# Altium PCB WiFi小车.PcbDoc
Units mil, origin at the board's own origin, x right, y up, seen from the top; angles counter-clockwise.
Board outline 3540 x 5911.67 mil, 2 copper layers (Top Layer, Bottom Layer); 23 components, 44 nets, 126 pads, 0 vias.
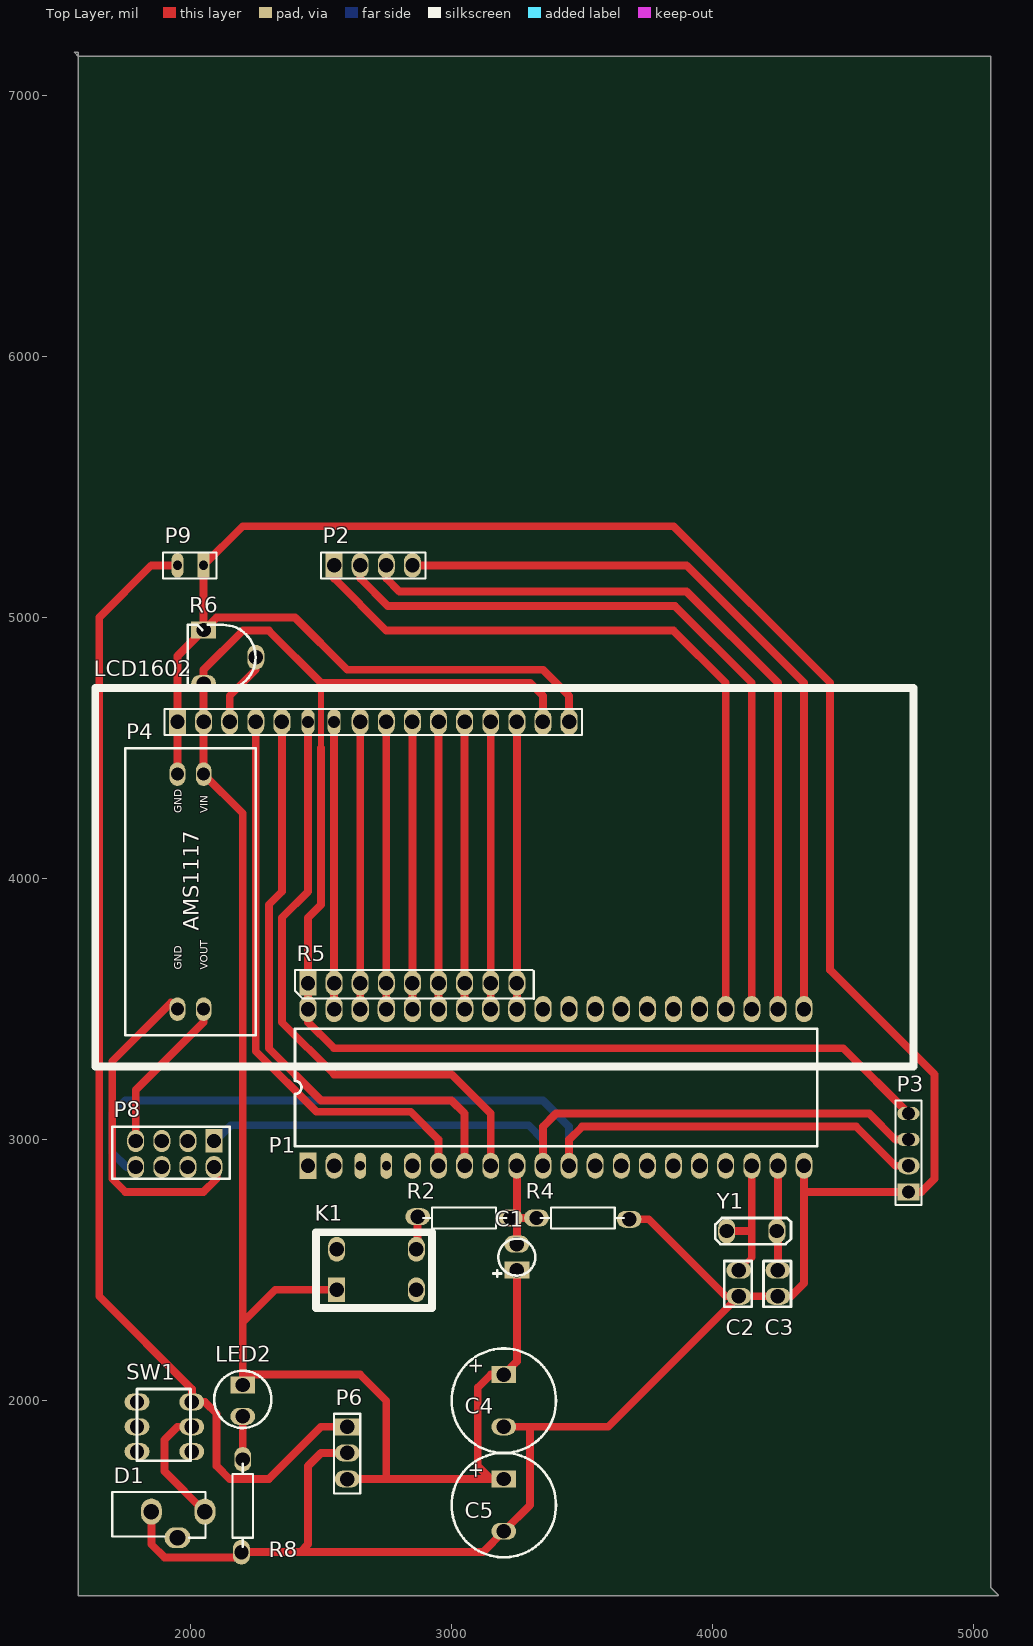
[diagram p0: Top Layer view]
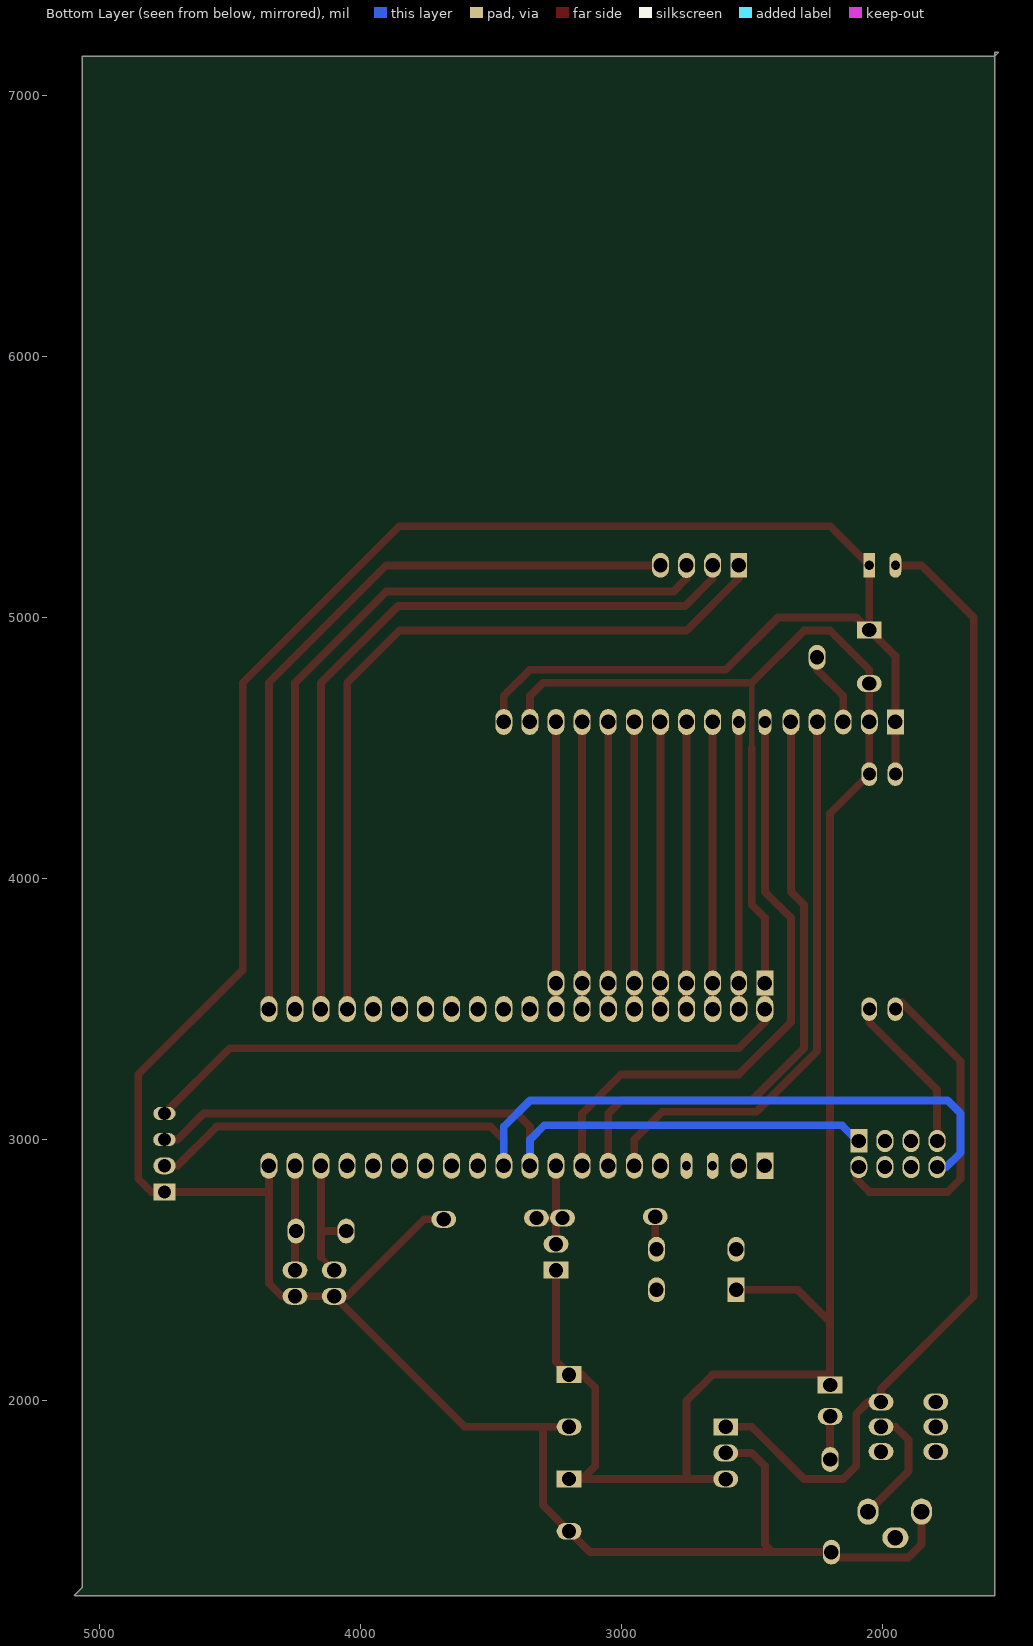
[diagram p1: Bottom Layer view, seen from below]

## Layer stack, top to bottom
Top Solder: solder mask 0.4, Solder Resist, Dk 3.5
Top Layer: signal copper 1.4
Dielectric1: dielectric 12.6, FR-4, Dk 4.8
Bottom Layer: signal copper 1.4
Bottom Solder: solder mask 0.4, Solder Resist, Dk 3.5

## Board outline
1555,7165 1570,7150 5065,7150 5065,1285 5095,1255 5093.33,1253.33 1570,1253.33 1570,7165

## Design rules (kind name [scope] priority, off if disabled: settings)
AssemblyTestPointUsage AssemblyTestPointUsage_1 [All] p2:
AssemblyTestpoint AssemblyTestpoint_1 [All] p2: testpointundercomponent=TRUE minsize=40 maxsize=100 preferedsize=60 minholesize=0 maxholesize=40 preferedholesize=32 testpointgrid=1 usegrid=TRUE gridtolerance=0.01 allowsidetop=TRUE allowsidebottom=TRUE
Clearance [All] p1: gap=13 ignorepadtopadclearanceinfootprint=FALSE except(0: Arc-Hole Track-Hole SMDPad-Hole THPad-Hole Via-Hole Fill-Hole Poly-Hole Region-Hole Text-Hole)
ComponentClearance ComponentClearance_1 [All] p2: gap=10 collisioncheckmode=3 verticalgap=10 showdistances=FALSE
DiffPairsRouting DiffPairsRouting_1 [All] p2: maxlimit=10 minlimit=10 mostfreqgap=10 toplayer_minwidth=15 toplayer_maxwidth=15 toplayer_prefwidth=15 bottomlayer_minwidth=15 bottomlayer_maxwidth=15 bottomlayer_prefwidth=15 maxuncoupledlength=500
FabricationTestPointUsage TestPointUsage [All] p2: valid=0 allowmultiple=FALSE
FabricationTestpoint Testpoint [All] p2: side=3 testpointundercomponent=TRUE minsize=40 maxsize=100 preferedsize=60 minholesize=0 maxholesize=40 preferedholesize=32 testpointgrid=1 allowsidetop=TRUE allowsidebottom=TRUE usegrid=TRUE gridtolerance=0.01
FanoutControl Fanout_LCC [IsLCC] p1: bgadir=Out bgaviamode=Centered fanoutstyle=Auto fanoutdirection=Alternating viagrid=1 // Fanout_LCC (Default Rule)
FanoutControl Fanout_BGA [IsBGA] p2: bgadir=Out bgaviamode=Centered fanoutstyle=Auto fanoutdirection=Alternating viagrid=1 // Fanout_BGA (Default Rule)
FanoutControl Fanout_Small [(CompPinCount < 5)] p3: bgadir=Out bgaviamode=Centered fanoutstyle=Auto fanoutdirection=OutThenIn viagrid=1 // Fanout_Small (Default Rule)
FanoutControl Fanout_SOIC [IsSOIC] p4: bgadir=Out bgaviamode=Centered fanoutstyle=Auto fanoutdirection=Alternating viagrid=1 // Fanout_SOIC (Default Rule)
FanoutControl Fanout_BGA_1 [IsBGA] p6: bgadir=Out bgaviamode=Centered fanoutstyle=Auto fanoutdirection=Alternating viagrid=1 // Fanout_BGA (Default Rule)
FanoutControl Fanout_LCC_1 [IsLCC] p7: bgadir=Out bgaviamode=Centered fanoutstyle=Auto fanoutdirection=Alternating viagrid=1 // Fanout_LCC (Default Rule)
FanoutControl Fanout_SOIC_1 [IsSOIC] p8: bgadir=Out bgaviamode=Centered fanoutstyle=Auto fanoutdirection=Alternating viagrid=1 // Fanout_SOIC (Default Rule)
FanoutControl Fanout_Small_1 [(CompPinCount < 5)] p9: bgadir=Out bgaviamode=Centered fanoutstyle=Auto fanoutdirection=OutThenIn viagrid=1 // Fanout_Small (Default Rule)
FanoutControl Fanout_Default_1 [All] p10: bgadir=Out bgaviamode=Centered fanoutstyle=Auto fanoutdirection=Alternating viagrid=1 // Fanout_Default (Default Rule)
Height Height_1 [All] p2: minheight=0 maxheight=1000 prefheight=500
HoleSize HoleSize_1 [All] p2: absolutevalues=TRUE maxlimit=100 minlimit=1 maxpercent=80.000 minpercent=20.000
HoleToHoleClearance HoleToHoleClearance_1 [All] p2: gap=10 allowstackedmicrovias=TRUE
LayerPairs LayerPairs_1 [All] p2: enforce=TRUE
MinimumSolderMaskSliver MinimumSolderMaskSliver_1 [All] p2: minsoldermaskwidth=10
NetAntennae NetAntennae_1 [All] p2: netantennaetolerance=0
PasteMaskExpansion PasteMaskExpansion_1 [All] p2: expansion=0
PlaneClearance PlaneClearance_1 [All] p2: clearance=20
PolygonConnect [All] p1: connectstyle=Relief reliefconductorwidth=10 reliefentries=4 polygonreliefangle="90 Angle" airgapwidth=10
PolygonConnect PolygonConnect_1 [All] p2: connectstyle=Relief reliefconductorwidth=10 reliefentries=4 polygonreliefangle="90 Angle" airgapwidth=10
RoutingPriority RoutingPriority_1 [All] p2: routingpriority=0
RoutingTopology RoutingTopology_1 [All] p2: topology=Shortest
RoutingVias [All] p1: holewidth=32 width=62 viastyle="Through Hole" minholewidth=28 minwidth=50 maxholewidth=28 maxwidth=50
ShortCircuit ShortCircuit_1 [All] p2: allowed=FALSE
SilkToSilkClearance SilkToSilkClearance_1 [All] p2: silktosilkclearance=10
SilkToSolderMaskClearance SilkscreenOverComponentPads [IsPad] p1: minsilkscreentomaskgap=10 clearancetoexposedcopper=TRUE
SilkToSolderMaskClearance SilkscreenOverComponentPads_1 [IsPad] p2: minsilkscreentomaskgap=10 clearancetoexposedcopper=TRUE
SolderMaskExpansion [All] p1: expansion=4
SolderMaskExpansion SolderMaskExpansion_1 [All] p2: expansion=4
UnRoutedNet UnRoutedNet_1 [All] p2:
Width [All] p1: maxlimit=50 minlimit=20 preferedwidth=30
25 further rules are at their usual default settings.

## Components (designator, comment, footprint, x,y, rotation, side; value= is the part's Value field where it differs from the comment)
C1 "10uf" 10uf 3250,2550 r180 top
C2 "30pf" C 4100,2450 r0 top
C3 "30pf" C 4250,2450 r0 top
C4 "470uf" C1000uf 3200,2000 r0 top
C5 "100uf" C1000uf 3200,1600 r0 top
D1 "DC5" DC5 1900,1500 r90 top
K1 "KEY" KEY 2650,2500 r180 top
LCD1602 "LCD1602" LCD1602 2700,4600 r0 top
LED2 "LED" LED 2200,2000 r90 top
P1 "STC12C5A60S2" STC89C52 3400,3200 r0 top
P2 "控制接口" 4H#1 2700,5200 r180 top
P3 "下载接口" 4H#2 4750,2950 r270 top
P4 "ASM117" 3.3V稳压模块 2050,4000 r90 top
P6 "7805" 3H 2600,1800 r90 top
P8 "ESP8266" NRF24L01 1900,2850 r270 top
P9 "" 2H 2000,5200 r0 top
R2 "1k" R 3050,2700 r0 top
R4 "10k" R 3500,2700 r180 top
R5 "10K" "R 10K*8" 2850,3600 r180 top
R6 "10K" "R 10K" 2150,4850 r0 top
R8 "1k" R 2200,1600 r90 top
SW1 "SW-6P" DCSW 1900,1900 r0 top
Y1 "11.0592" crystal 4150,2650 r0 top

## Footprints (in the part's own frame and the unit in brackets; to place one, negate y for a bottom-side part, rotate by r counter-clockwise, add the part's x,y. Pads: shape width x height; smd on the part's side, far side on the other; paste and mask are expansions set on the pad)
2H [mm]
  rect 1.144x2.414 hole 0.9: 1(1.27,0)
  oval 1.144x2.414 hole 0.9: 2(-1.27,0)
  silkscreen extent -2.67,-1.27 2.54,1.27
3.3V稳压模块 [mil]
  oval 90x60 hole 50: 1(400,100) 2(400,0) 3(-500,100) 4(-500,0)
  silkscreen extent -600,-200 500,300
3H [mil]
  rect 65.06x95.06 hole 55.43: 1(100,0)
  oval 65.06x95.06 hole 55.43: 2(0,0) 3(-100,0)
  silkscreen extent -155,-50 150,50
4H#1 [mil]
  rect 65.06x95.06 hole 55.43: 1(150,0)
  oval 65.06x95.06 hole 55.43: 2(50,0)
  oval 65.06x96.06 hole 55: 3(-50,0)
  oval 65.06x95.06 hole 55: 4(-150,0)
  silkscreen extent -200,-50 200,50
4H#2 [mil]
  rect 65.06x85.06 hole 50.43: 1(150,0)
  oval 65.06x85.06 hole 50.43: 2(50,0)
  oval 50.05x86.06 hole 50: 3(-50,0)
  oval 50.05x85.06 hole 50: 4(-150,0)
  silkscreen extent -200,-50 200,50
10uf [mil]
  rect 95x65 hole 55: 1(0,50)
  oval 95x65 hole 55: 2(0,-50)
  silkscreen extent -71,-71 90,75
C [mil]
  oval 95x65 hole 55: 1(0,50) 2(0,-50)
  silkscreen extent -55,-90 50,85
C1000uf [mil]
  rect 95x65 hole 55: 1(0,100)
  oval 95x65 hole 55: 2(0,-100)
  silkscreen extent -200,-200 200,200
crystal [mil]
  oval 65x95 hole 55: 1(-96.06,0) 2(96.06,0)
  silkscreen extent -140,-50 150,50
DC5 [mil]
  oval 100x80 hole 60: 1(75,50) 2(75,-155)
  oval 80x100 hole 60: 3(-25,-50)
  silkscreen extent -25,-157 150,200
DCSW [mil]
  oval 95x65 hole 55: 1(105,95) 2(105,0) 3(105,-95) 4(-105,95) 5(-105,0) 6(-105,-95)
  silkscreen extent -105,-130 100,145
KEY [mil]
  rect 65x95 hole 55: 1(90,75)
  oval 65x95 hole 55: 2(90,-80) 3(-215,-80) 4(-215,75)
  silkscreen extent -275,-145 170,145
LCD1602 [mil]
  rect 65.06x95.06 hole 55.43: 1(-750,0)
  oval 65.06x95.06 hole 55.43: 2(-650,0) 3(-550,0)
  oval 65.06x99.06 hole 55.43: 4(-450,0) 5(-350,0) 8(-50,0) 9(50,0) 10(150,0) 11(250,0) 12(350,0) 13(450,0) 14(550,0) 15(650,0) 16(750,0)
  oval 50.05x99.06 hole 45.43: 6(-250,0) 7(-150,0)
  silkscreen extent -1065,-1320 2070,130
LED [mil]
  rect 65x95 hole 55: 1(60,0)
  oval 65x95 hole 55: 2(-60,0)
  silkscreen extent -105,-110 115,110
NRF24L01 [mil]
  rect 90x65 hole 55: 1(-145,190)
  oval 85x65 hole 55: 2(-145,90) 3(-145,-10) 4(-145,-110) 5(-45,-110) 6(-45,-10) 7(-45,90) 8(-45,190)
  silkscreen extent -200,-200 0,250
R [mil]
  oval 95x65 hole 55: 1(-180,5) 2(175,0)
  silkscreen extent -160,-40 160,40
"R 10K" [mil]
  rect 95x65 hole 55: 1(-100,102.5)
  oval 65x95 hole 55: 2(100,-2.5)
  oval 95x65 hole 55: 3(-100,-102.5)
  silkscreen extent -160,-127 99,122
"R 10K*8" [mil]
  rect 65.06x95.06 hole 55.43: 1(400,0)
  oval 65.06x95.06 hole 55.43: 2(300,0) 3(200,0) 4(100,0) 5(0,0) 6(-100,0) 7(-200,0) 8(-300,0)
  oval 65.06x96.06 hole 55.43: 9(-400,0)
  silkscreen extent -465,-50 450,60
STC89C52 [mil]
  rect 65x100 hole 55: 1(-950,-300)
  oval 65x100 hole 55: 2(-850,-300) 5(-550,-300) 6(-450,-300) 7(-350,-300) 8(-250,-300) 9(-150,-300) 10(-50,-300) 11(50,-300) 12(150,-300) 13(250,-300) 14(350,-300) 15(450,-300) 16(550,-300) 17(650,-300) 18(750,-300) 19(850,-300) 20(950,-300) 21(950,300) 22(850,300) 23(750,300)
  oval 45x100 hole 35: 3(-750,-300) 4(-650,-300)
  oval 66x100 hole 55: 24(650,300) 25(550,300) 26(450,300) 27(350,300) 28(250,300) 29(150,300) 30(50,300) 31(-50,300) 32(-150,300) 33(-250,300) 34(-350,300) 35(-450,300) 36(-550,300) 37(-650,300) 38(-750,300) 39(-850,300) 40(-950,300)
  silkscreen extent -1000,-225 1000,225

## Part data
C1: library part "C 10uf", "?"
C2 C3: library part C, "?"
C4 C5: library part C1000uf
K1 SW1: "?"
LCD1602: "Һ"
P1: library part STC89C52
P4: library part ASM117稳压模块, "稳压模块"
P8: library part n
P9: library part 2H
R2 R4 R8: library part R
R5: library part R10K*8
R6: library part R10K, "?"
Y1: library part crystal

## Nets (pads, with @x,y where several pads share a name; then routed paths per layer and width w, separated by ;. In a path a pad name is that pad's centre, name@x,y a point inside that pad or via, vN(x,y) a via of type N, cw(c..) or ccw(c..) an arc to the next point about the centre after c; other vN are vias at no path point)
GND: C2.2 C3.2 C4.2 C5.2 D1.1 LCD1602.1 LCD1602.16 P1.20 P3.1 P4.1 P6.2 P9.1 R4.1 R6.1 R8.1 | length 12644.1
  Top Layer w30: D1.1 1850,1450 1900,1400 2175,1400 R8.1 2420,1420 ; P4.1 LCD1602.1 1950,4852.5 R6.1 ; P6.2 2500,1800 2450,1750 2450,1450 2420,1420 ; C4.2 3300,1900 ; LCD1602.16 3450,4700 3350,4800 2600,4800 2400,5000 2100,5000 2052.5,4952.5 R6.1 ; R4.1 3755,2695 4050,2400 C2.2 ; P1.20 4350,2800 ; R6.1 P9.1 2200,5350 3850,5350 4450,4750 4450,3650 4850,3250 4850,2850 4800,2800 P3.1 4350,2800 ; 2420,1420 3120,1420 C5.2 3300,1600 3300,1900 ; 3300,1900 3600,1900 C2.2 ; C2.2 C3.2 4300,2400 4350,2450 4350,2800
NetD1_2: D1.2 SW1.2 | length 464.9
  Top Layer w30: SW1.2 1950,1900 1900,1850 1900,1730 D1.2
NetK1_3: K1.3 R2.1 | length 120
  Top Layer w30: K1.3@2870,2585 R2.1
NetLCD1602_3: LCD1602.3 R6.2 | length 288.9
  Top Layer w30: LCD1602.3 2150,4700 2250,4800 R6.2
NetLED2_2: LED2.2 R8.2 | length 165
  Top Layer w30: R8.2 LED2.2
NetP4_3: P4.3 P8.8 | length 1244.6
  Top Layer w30: P4.3@1925,3525 1700,3300 1700,2850 1750,2800 2050,2800 2100,2850 P8.8@2100,2885
NetP4_4: P4.4 P8.4 | length 612.7
  Top Layer w30: P8.4 1790,3190 2050,3450 P4.4
P0^0: LCD1602.7 P1.39 R5.2 | length 1100
  Top Layer w30: P1.39 R5.2 LCD1602.7
P0^1: LCD1602.8 P1.38 R5.3 | length 1100
  Top Layer w30: P1.38 R5.3 LCD1602.8
P0^2: LCD1602.9 P1.37 R5.4 | length 1100
  Top Layer w30: P1.37 R5.4 LCD1602.9
P0^3: LCD1602.10 P1.36 R5.5 | length 1100
  Top Layer w30: P1.36 R5.5 LCD1602.10
P0^4: LCD1602.11 P1.35 R5.6 | length 1100
  Top Layer w30: P1.35 R5.6 LCD1602.11
P0^5: LCD1602.12 P1.34 R5.7 | length 1100
  Top Layer w30: P1.34 R5.7 LCD1602.12
P0^6: LCD1602.13 P1.33 R5.8 | length 1100
  Top Layer w30: P1.33 R5.8 LCD1602.13
P0^7: LCD1602.14 P1.32 R5.9 | length 1100
  Top Layer w30: P1.32 R5.9 LCD1602.14
P1^0: P1.1
P1^1: P1.2
P1^2: P1.3
P1^3: P1.4
P1^4: P1.5
P1^5: LCD1602.4 P1.6 | length 2201.3
  Top Layer w30: LCD1602.4 2250,3339.19 2482.19,3107 2843,3107 2950,3000 P1.6
P1^6: LCD1602.5 P1.7 | length 2324.3
  Top Layer w30: LCD1602.5 2350,3950 2300,3900 2300,3350 2500,3150 3000,3150 3050,3100 P1.7
P1^7: LCD1602.6 P1.8 | length 2336.4
  Top Layer w30: LCD1602.6 2450,3950 2350,3850 2350,3450 2550,3250 3000,3250 3150,3100 P1.8
P2^0: P1.21 P2.4 | length 2936.4
  Top Layer w30: P2.4 3900,5200 4350,4750 P1.21
P2^1: P1.22 P2.3 | length 2965.7
  Top Layer w30: P2.3 2750,5150 2800,5100 3900,5100 4250,4750 P1.22
P2^2: P1.23 P2.2 | length 2965.7
  Top Layer w30: P2.2 2650,5150 2755.41,5044.59 3855.41,5044.59 4150,4750 P1.23
P2^3: P1.24 P2.1 | length 2965.7
  Top Layer w30: P2.1 2550,5150 2750,4950 3850,4950 4050,4750 P1.24
P2^4: P1.25
P2^5: P1.26
P2^6: P1.27
P2^7: P1.28
P3^0: P1.10 P3.3 P8.1 | length 3043.1
  Top Layer w30: P1.10 3350,3050 3400,3100 4600,3100 4700,3000 P3.3
  Bottom Layer w30: P8.1@2075,2975 2155,3055 3295,3055 3350,3000 P1.10
P3^1: P1.11 P3.2 P8.5 | length 3707.8
  Top Layer w30: P1.11 3450,3000 3500,3050 4550,3050 4700,2900 P3.2
  Bottom Layer w30: P8.5 1755,2895 1700,2950 1700,3100 1750,3150 3350,3150 3450,3050 P1.11
P3^2: P1.12
P3^3: P1.13
P3^4: P1.14
P3^5: P1.15
P3^6: P1.16
P3^7: P1.17
RST: C1.2 P1.9 R2.2 R4.2 | length 400
  Top Layer w30: R2.2 R2.2@3250,2700 ; C1.2 R2.2@3250,2700 ; P1.9 R2.2@3250,2700 ; R4.2 R2.2@3250,2700
VCC: C1.1 C4.1 C5.1 K1.1 LCD1602.2 LCD1602.15 LED2.1 P1.40 P3.4 P4.2 P6.3 R5.1 R6.3 | length 10948.8
  Top Layer w22: 2500,4500 2500,4750
  Top Layer w30: LED2.1 2200,2100 ; 2500,4500 2500,3900 2450,3850 R5.1 P1.40 2450,3450 2550,3350 4500,3350 P3.4 ; K1.1 2325,2425 2200,2300 ; P6.3 2750,1700 ; C5.1 3150,1700 ; C1.1 3250,2150 C4.1 3150,2100 3100,2050 3100,1750 3150,1700 ; LCD1602.15 3350,4700 3300,4750 2500,4750 2300,4950 2200,4950 2050,4800 R6.3 LCD1602.2 P4.2 2200,4250 2200,2300 ; 2200,2100 2650,2100 2750,2000 2750,1700 ; 2200,2100 2200,2300 ; 2750,1700 3150,1700
VCC12: P6.1 P9.2 SW1.1 | length 4452.5
  Top Layer w30: P9.2 1850,5200 1650,5000 1650,2400 2005,2045 SW1.1 2055,1995 2100,1950 2100,1750 2150.5,1699.5 2225.06,1699.5 2225.56,1700 2300,1700 2500,1900 P6.1
XTAL1: C3.1 P1.19 Y1.2 | length 400
  Top Layer w30: C3.1 P1.19
XTAL2: C2.1 P1.18 Y1.1 | length 516.8
  Top Layer w20: C2.1 4150,2550
  Top Layer w30: Y1.1 4150,2650 ; 4150,2550 4150,2650 ; P1.18 4150,2650
pads on no net: D1.3 K1.2 K1.4 P1.29 P1.30 P1.31 P8.2 P8.3 P8.6 P8.7 SW1.3 SW1.4 SW1.5 SW1.6

## Dimensions
1540.94,1345.99 to 5070.94,1245.99 on Top Overlay
1165,1235 to 1285,7160 on Top Overlay

## Text inside footprints (layer, text, board x,y; h text height)
C4: Top Overlay "+" at 3050,2100 h100 r270
C5: Top Overlay "+" at 3050,1700 h100 r270
P4: Top Overlay "AMS1117" at 2050,3800 h100 r90; Top Overlay "GND" at 1975,4250 h50 r90; Top Overlay "GND" at 1975,3650 h50 r90; Top Overlay "VIN" at 2075,4250 h50 r90; Top Overlay "VOUT" at 2075,3650 h50 r90